# Altium PCB BK Robot.PcbDoc (part 1 of 2)
Units mil, origin at the board's own origin, x right, y up, seen from the top; angles counter-clockwise.
Board outline 3937.01 x 3937.01 mil, 2 copper layers (Top Layer, Bottom Layer); 189 components, 168 nets, 636 pads, 401 vias.
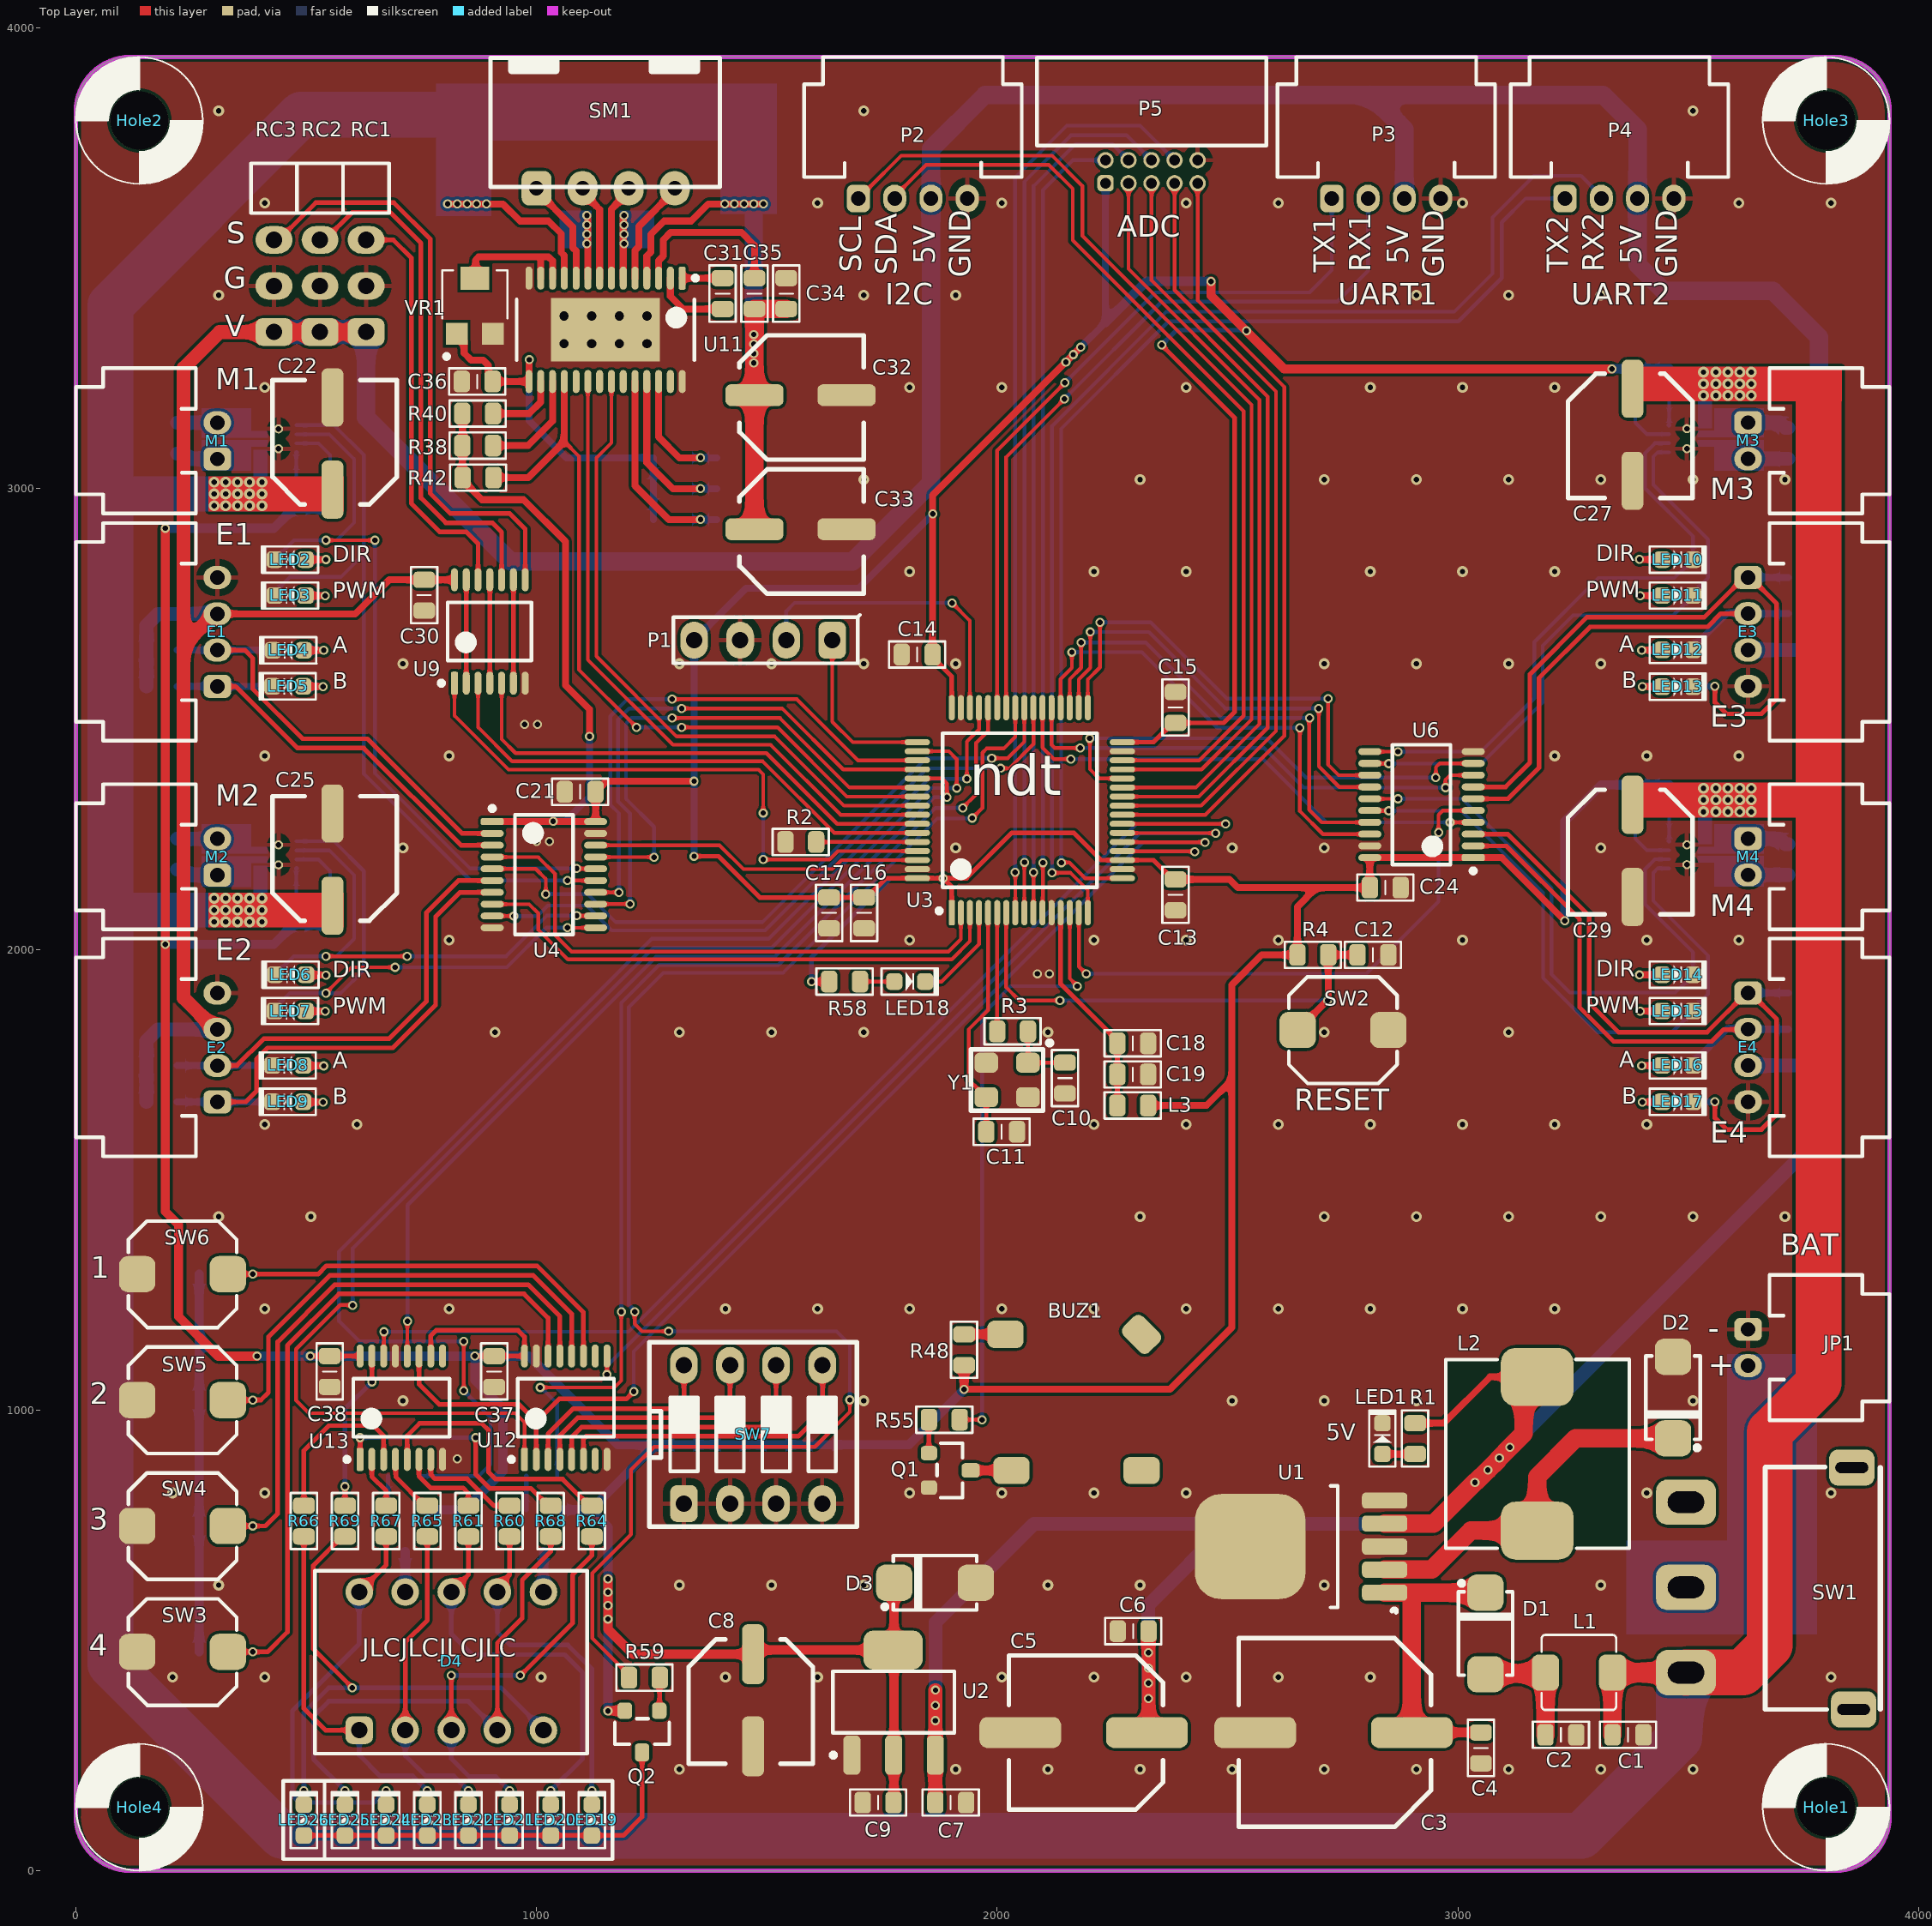
[diagram p0: Top Layer view]
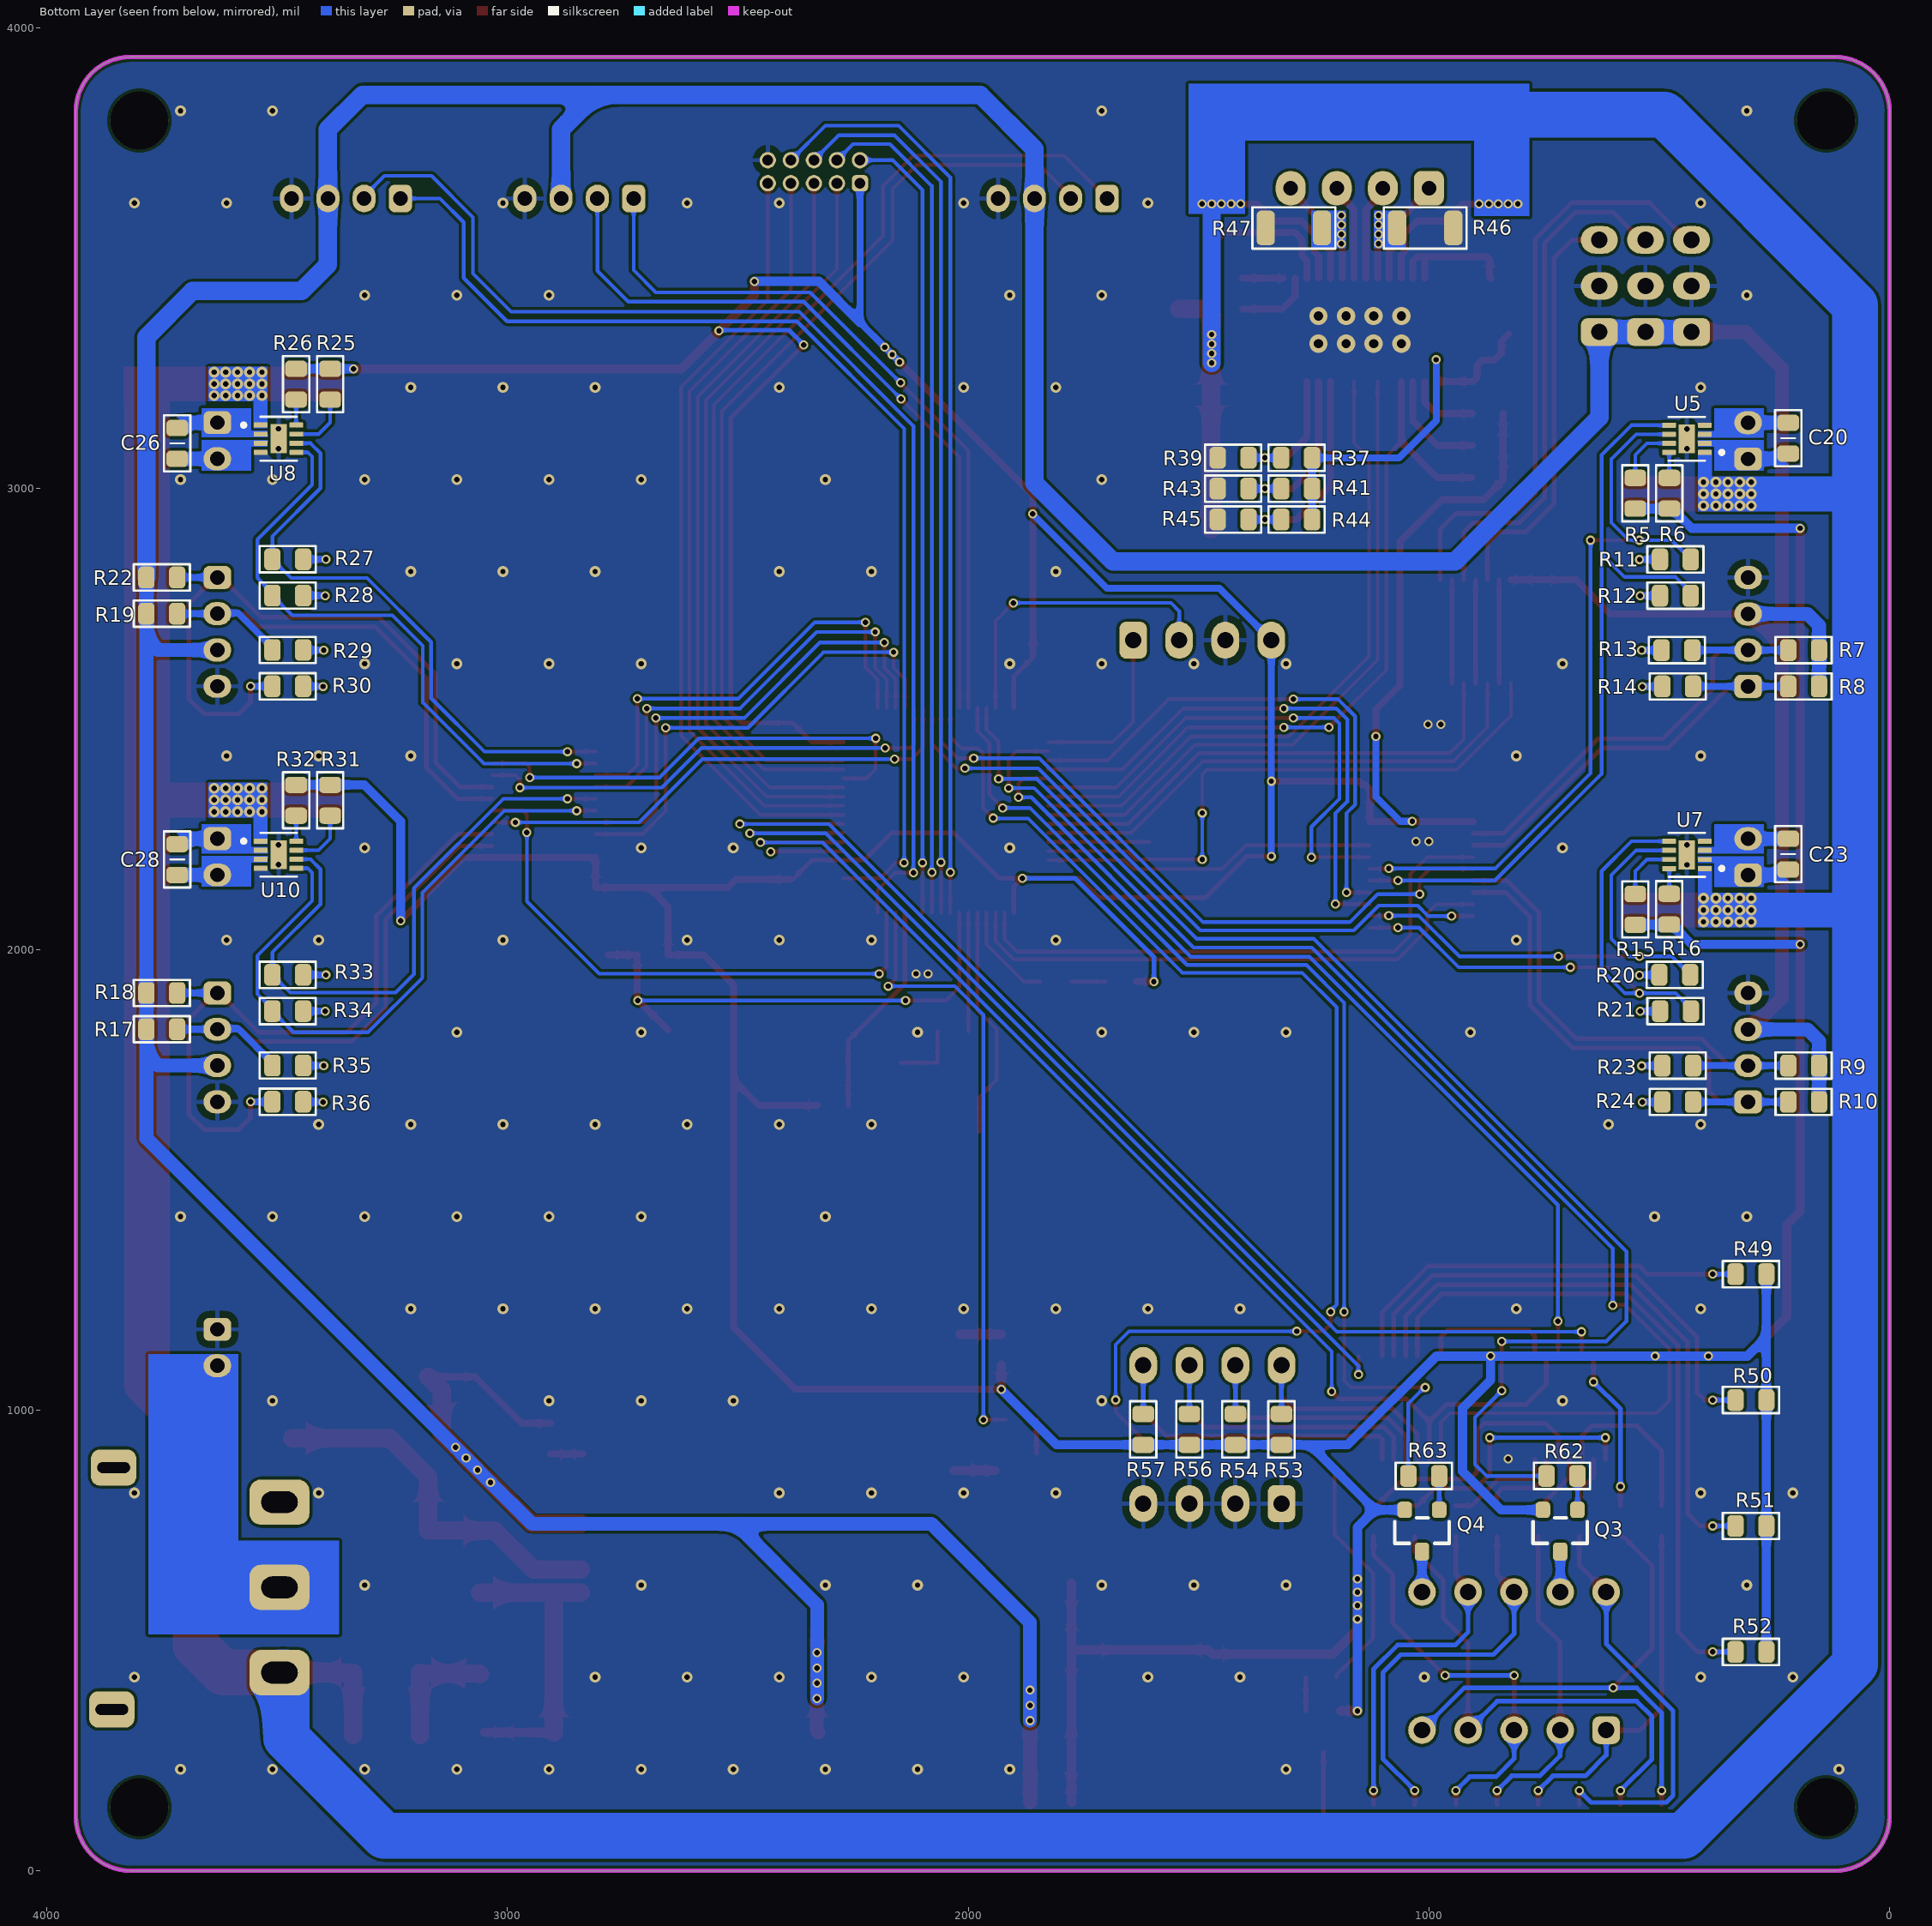
[diagram p1: Bottom Layer view, seen from below]
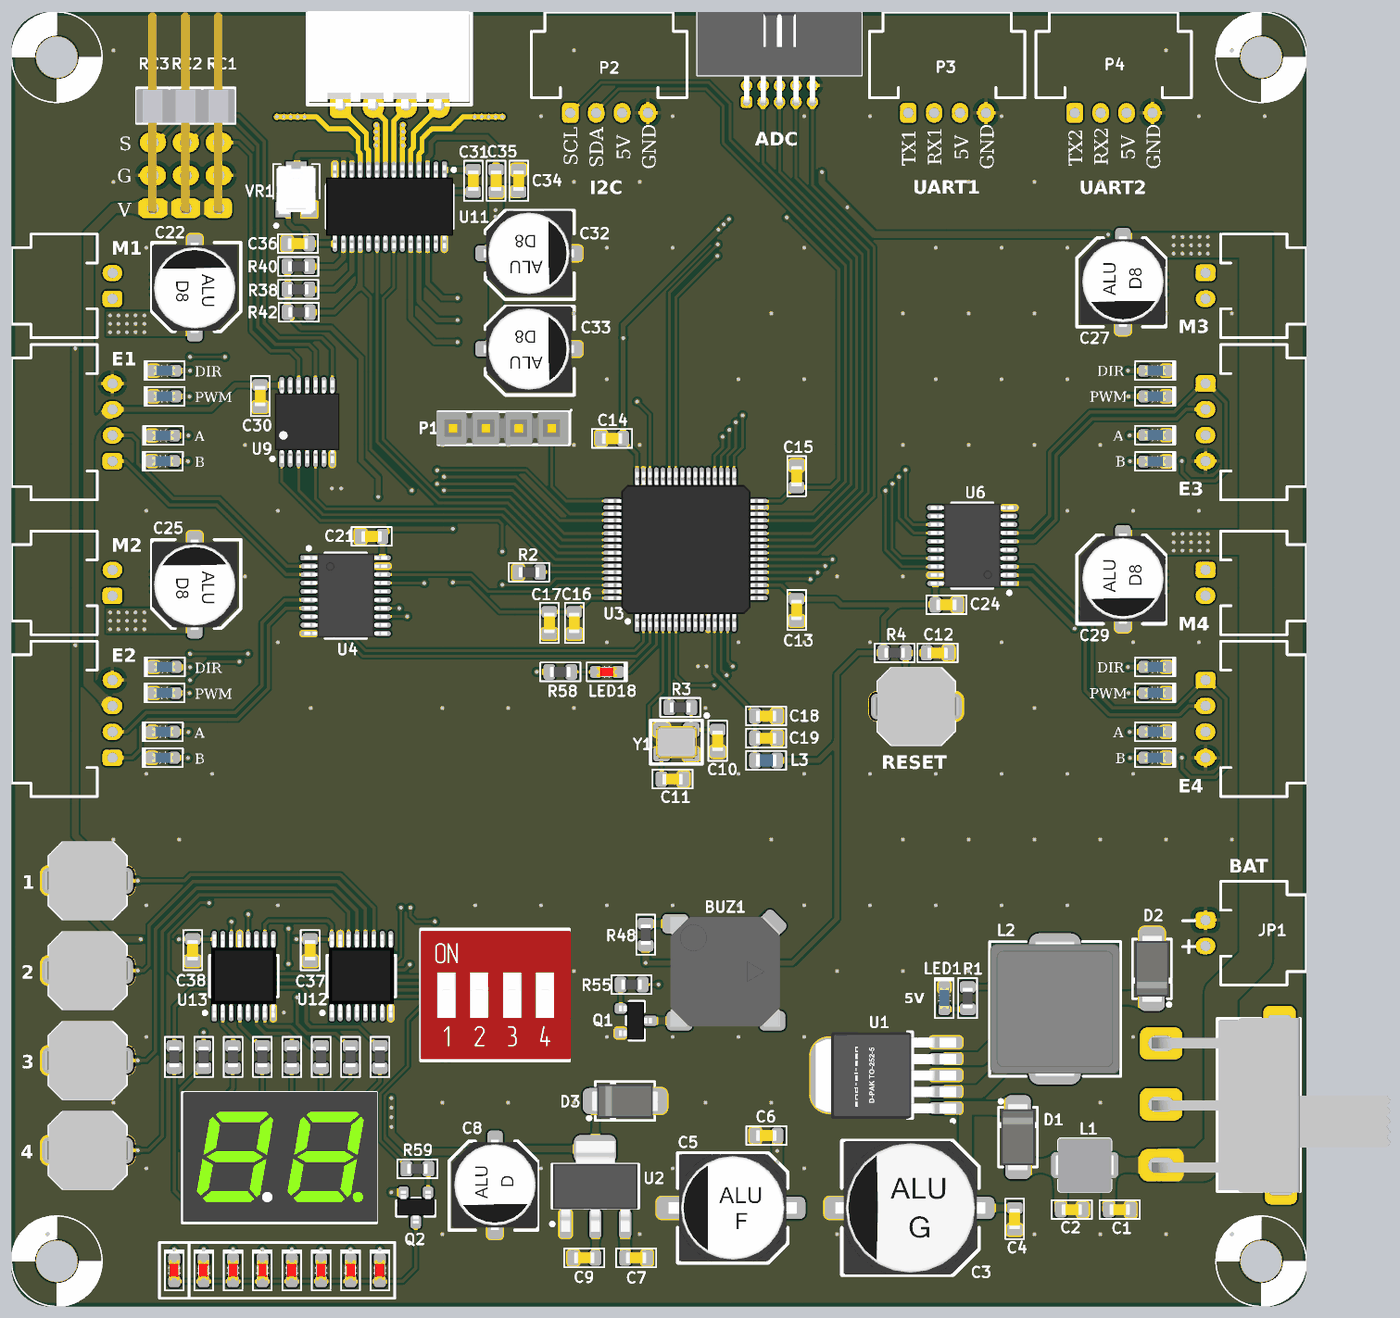
[diagram p3: 3D render of the assembled board from above, using the file's embedded part models]
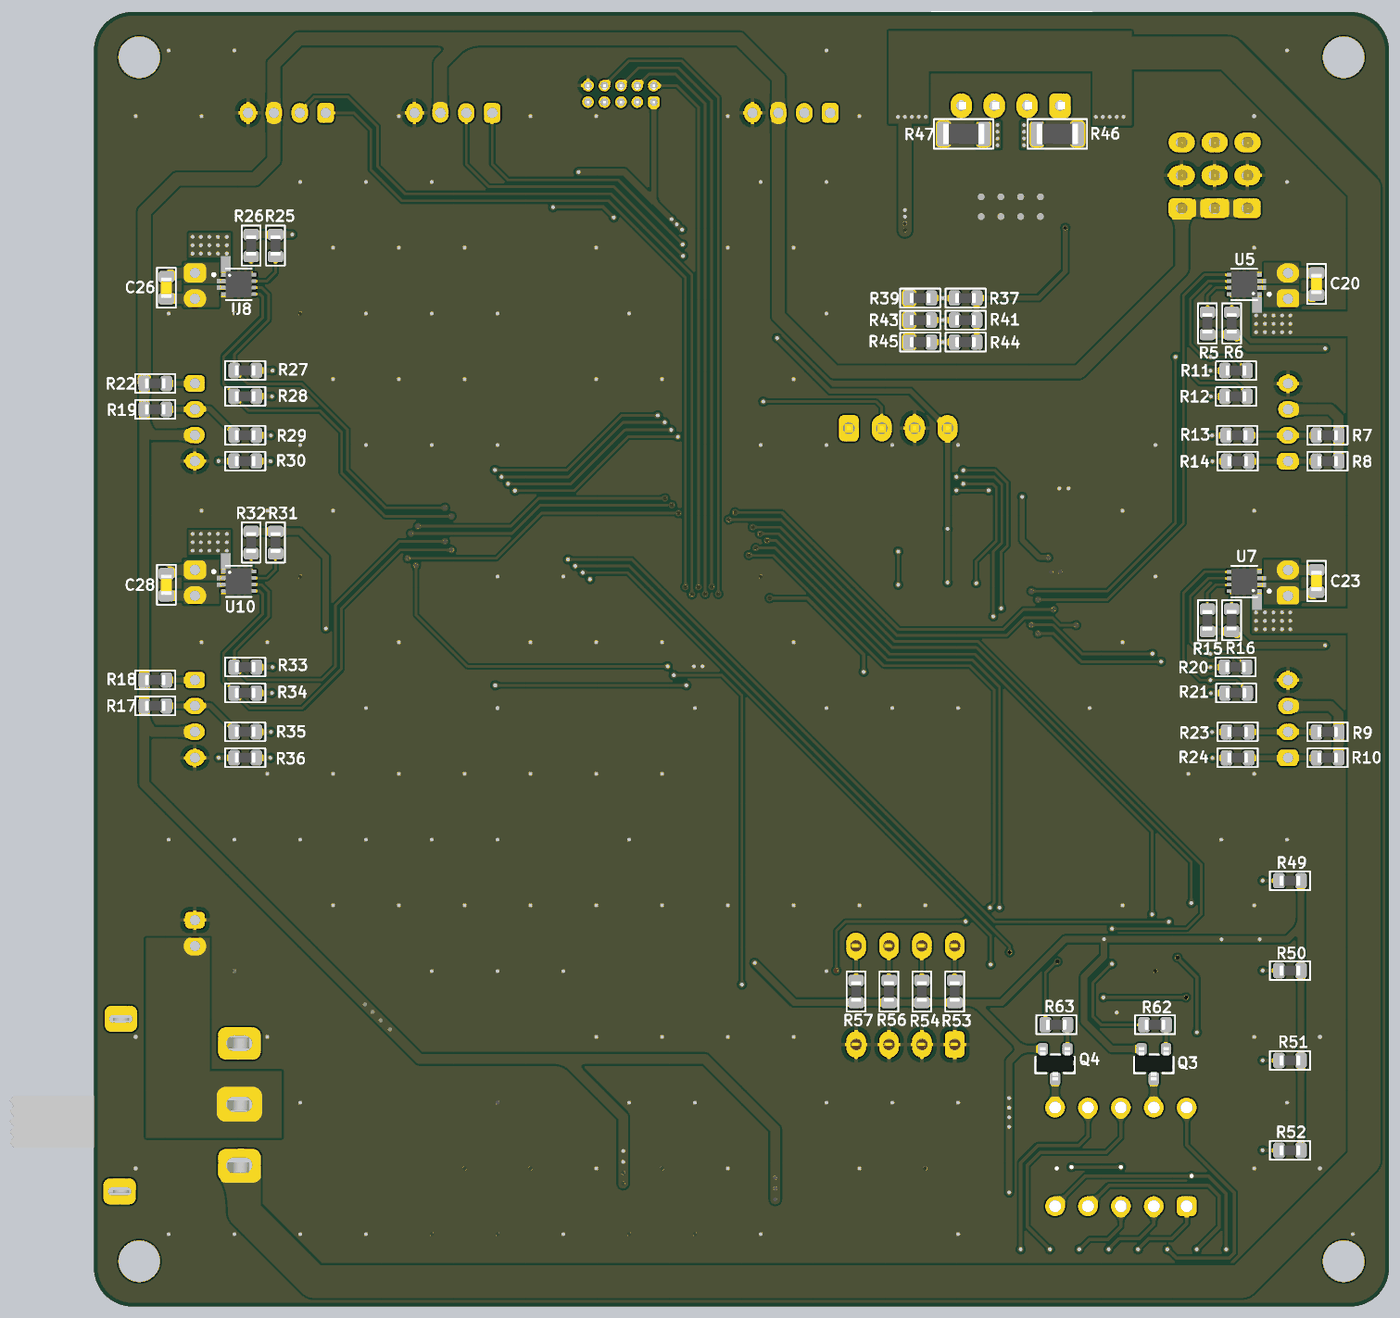
[diagram p4: 3D render of the assembled board from below, using the file's embedded part models]

## Layer stack, top to bottom
Top Solder: solder mask 0.4, Solder Resist, Dk 3.5
Top Layer: signal copper 1.4
Dielectric 1: dielectric 12.6, FR-4, Dk 4.8
Bottom Layer: signal copper 1.4
Bottom Solder: solder mask 0.4, Solder Resist, Dk 3.5

## Board outline
0,118.11 ccw(c118.11,118.11) 118.11,0 3818.9,0 ccw(c3818.9,118.11) 3937.01,118.11 3937.01,3818.9 ccw(c3818.9,3818.9) 3818.9,3937.01 118.11,3937.01 ccw(c118.11,3818.9) 0,3818.9

## Design rules (kind name [scope] priority, off if disabled: settings)
Clearance [All] p1: gap=6 ignorepadtopadclearanceinfootprint=FALSE except(0: Arc-Hole Track-Hole SMDPad-Hole THPad-Hole Via-Hole Fill-Hole Poly-Hole Region-Hole Text-Hole; 7: Track-SMDPad; 10: Arc-Arc Arc-THPad Arc-Fill Arc-Text Track-THPad Track-Fill Track-Text SMDPad-THPad SMDPad-Fill SMDPad-Text THPad-THPad THPad-Fill THPad-Text Via-Fill Via-Text Fill-Fill Fill-Text Poly-Text Region-Text Text-Text)
PolygonConnect [All] p1: thpad.connectstyle=Relief thpad.reliefconductorwidth=10 thpad.reliefentries=4 thpad.polygonreliefangle="90 Angle" thpad.airgapwidth=15 smdpad.connectstyle=Direct smdpad.reliefconductorwidth=10 smdpad.reliefentries=4 smdpad.polygonreliefangle="90 Angle" smdpad.airgapwidth=10 via.connectstyle=Direct via.reliefconductorwidth=10 via.reliefentries=4 via.polygonreliefangle="90 Angle" via.airgapwidth=10
RoutingVias [All] p1: holewidth=28 width=50 viastyle="Through Hole" minholewidth=11.81 minwidth=19.68 maxholewidth=28 maxwidth=50
SolderMaskExpansion [All] p1: expansion=4 istentingtop=FALSE
Width [All] p1: maxlimit=100 minlimit=8 preferedwidth=10
30 further rules are at their usual default settings.

## Classes and differential pairs
component class Power: C1 C2 C3 C4 C5 C6 C7 C8 C9 D1 D2 D3 Hole1 Hole2 Hole3 Hole4 JP1 L1 L2 LED1 R1 SW1 U1 U2
component class Peripheral: P2 P4 P5
component class MotorDriver: C20 C21 C22 C23 C24 C25 C26 C27 C28 C29 C30 C31 C32 C33 C34 C35 C36 E1 E2 E3 E4 LED2 LED3 LED4 LED5 LED6 LED7 LED8 LED9 LED10 LED11 LED12 LED13 LED14 LED15 LED16 LED17 M1 M2 M3 M4 R5 R6 R7 R8 R9 R10 R11 R12 R13 R14 R15 R16 R17 R18 R19 R20 R21 R22 R23 R24 R25 R26 R27 R28 R29 R30 R31 R32 R33 R34 R35 R36 R37 R38 R39 R40 R41 R42 R43 R44 R45 R46 R47 RC1 RC2 RC3 SM1 U4 U5 U6 U7 U8 U9 U10 U11 VR1
component class MCU: C10 C11 C12 C13 C14 C15 C16 C17 C18 C19 L3 R2 R3 R4 SW2 U3 Y1
component class Debug: BUZ1 C37 C38 D4 LED18 LED19 LED20 LED21 LED22 LED23 LED24 LED25 LED26 P2 Q1 Q2 Q3 Q4 R48 R49 R50 R51 R52 R53 R54 R55 R56 R57 R58 R59 R60 R61 R62 R63 R64 R65 R66 R67 R68 R69 SW3 SW4 SW5 SW6 SW7 U12 U13

## Components (designator, comment, footprint, x,y, rotation, side; value= is the part's Value field where it differs from the comment)
BUZ1 "MTL-8530" MLT-8530 2018,1164.28 r0 top
C1 "100nF" "C 0603 (1608)" 3369.13,295 r0 top
C2 "100nF" "C 0603 (1608)" 3223.46,295 r0 top
C3 "330uF/50V" "C SMD ALU (G)" 2730,300 r180 top
C4 "100nF" "C 0603 (1608)" 3050,266.54 r270 top
C5 "330uF/25V" "C SMD ALU (F)" 2187.5,300 r180 top
C6 "100nF" "C 0603 (1608)" 2295,520 r180 top
C7 "100nF" "C 0603 (1608)" 1899.02,148 r0 top
C8 "220uF/10V" "C SMD ALU (D)" 1470,370 r270 top
C9 "100nF" "C 0603 (1608)" 1741.54,148 r180 top
C10 "22pF" "C 0603 (1608)" 2147,1720.54 r270 top
C11 "22pF" "C 0603 (1608)" 2009.63,1604 r0 top
C12 "100nF" "C 0603 (1608)" 2815.54,1988 r0 top
C13 "100nF" "C 0603 (1608)" 2387,2118.37 r270 top
C14 "100nF" "C 0603 (1608)" 1826,2640 r180 top
C15 "100nF" "C 0603 (1608)" 2387,2525 r90 top
C16 "100nF" "C 0603 (1608)" 1711,2079 r270 top
C17 "10uF" "C 0603 (1608)" 1635,2079 r270 top
C18 "100nF" "C 0603 (1608)" 2294,1796 r0 top
C19 "10uF" "C 0603 (1608)" 2294,1728.5 r0 top
C20 "100nF" "C 0603 (1608)" 220,3109.73 r270 bottom
C21 "100nF" "C 0603 (1608)" 1094.74,2342 r180 top
C22 "100uF/25V" "C SMD ALU (D8)" 557,3098 r90 top
C23 "100nF" "C 0603 (1608)" 220,2206.54 r270 bottom
C24 "100nF" "C 0603 (1608)" 2842.24,2134.08 r0 top
C25 "100uF/25V" "C SMD ALU (D8)" 557,2194.81 r90 top
C26 "100nF" "C 0603 (1608)" 3716.98,3098.22 r90 bottom
C27 "100uF/25V" "C SMD ALU (D8)" 3379,3117 r270 top
C28 "100nF" "C 0603 (1608)" 3716.98,2195.02 r90 bottom
C29 "100uF/25V" "C SMD ALU (D8)" 3379,2213.81 r270 top
C30 "100nF" "C 0603 (1608)" 756,2768.74 r270 top
C31 "10nF" "C 0603 (1608)" 1404,3423.54 r90 top
C32 "100uF/25V" "C SMD ALU (D8)" 1573,3203 r0 top
C33 "100uF/25V" "C SMD ALU (D8)" 1573,2912 r0 top
C34 "100nF" "C 0603 (1608)" 1542,3423.54 r270 top
C35 "100nF" "C 0603 (1608)" 1473,3423.54 r90 top
C36 "1uF" "C 0603 (1608)" 871,3232.59 r180 top
C37 "100nF" "C 0603 (1608)" 908,1083.74 r270 top
C38 "100nF" "C 0603 (1608)" 551,1083.74 r270 top
D1 "SS34" "DO-214AC (SMA)" 3060,515 r90 top
D2 "SS34" "DO-214AC (SMA)" 3467,1027 r270 top
D3 "SS34" "DO-214AC (SMA)" 1865,625 r180 top
D4 "LED7_2281BS" "LED7 2281" 615,305 r0 top
E1 "HY2.0-4P" HY2.0-4P-RA 306.98,2570.78 r90 top
E2 "HY2.0-4P" HY2.0-4P-RA 306.98,1668.78 r90 top
E3 "HY2.0-4P" HY2.0-4P-RA 3630,2807.3 r270 top
E4 "HY2.0-4P" HY2.0-4P-RA 3630,1905.3 r270 top
Hole1 "3mm" SCREW/3M/7M 3799.21,137.8 r0 top
Hole2 "3mm" SCREW/3M/7M 137.8,3799.21 r0 top
Hole3 "3mm" SCREW/3M/7M 3799.21,3799.21 r0 top
Hole4 "3mm" SCREW/3M/7M 137.8,137.8 r0 top
JP1 "HY2.0-2P" HY2.0-2P-RA 3630,1175 r270 top value="Connector 2"
L1 "10uH" "Inductor SMD 0420" 3335.67,429.92 r0 top
L2 "33uH/3A" "Inductor SMD 10x10x5" 3172,905 r90 top
L3 "600R" "L 0603 (1608)" 2294,1531 r0 top
LED1 "Led-Red" "Led SMD 0603" 2836,938 r90 top
LED2 "Led-Red" "Led SMD 0603" 465,2846 r180 top
LED3 "Led-Red" "Led SMD 0603" 465,2768 r180 top
LED4 "Led-Red" "Led SMD 0603" 461,2649 r180 top
LED5 "Led-Red" "Led SMD 0603" 460,2571 r180 top
LED6 "Led-Red" "Led SMD 0603" 466,1945 r180 top
LED7 "Led-Red" "Led SMD 0603" 465,1866 r180 top
LED8 "Led-Red" "Led SMD 0603" 460,1748 r180 top
LED9 "Led-Red" "Led SMD 0603" 460,1669 r180 top
LED10 "Led-Red" "Led SMD 0603" 3477,2846 r0 top
LED11 "Led-Red" "Led SMD 0603" 3477,2768 r0 top
LED12 "Led-Red" "Led SMD 0603" 3477,2650 r0 top
LED13 "Led-Red" "Led SMD 0603" 3477,2570 r0 top
LED14 "Led-Red" "Led SMD 0603" 3477,1945 r0 top
LED15 "Led-Red" "Led SMD 0603" 3477,1866 r0 top
LED16 "Led-Red" "Led SMD 0603" 3477,1748 r0 top
LED17 "Led-Red" "Led SMD 0603" 3477,1669 r0 top
LED18 "Led-Red" "Led SMD 0603 RED" 1810,1930 r0 top
LED19 "Led-Red" "Led SMD 0603 RED" 1120,110 r90 top
LED20 "Led-Red" "Led SMD 0603 RED" 1030.71,110 r90 top
LED21 "Led-Red" "Led SMD 0603 RED" 941.43,110 r90 top
LED22 "Led-Red" "Led SMD 0603 RED" 852.14,110 r90 top
LED23 "Led-Red" "Led SMD 0603 RED" 762.86,110 r90 top
LED24 "Led-Red" "Led SMD 0603 RED" 673.57,110 r90 top
LED25 "Led-Red" "Led SMD 0603 RED" 584.29,110 r90 top
LED26 "Led-Red" "Led SMD 0603 RED" 495,110 r90 top
M1 "HY2.0-2P" HY2.0-2P-RA 306.98,3064.45 r90 top value="Connector 2"
M2 "HY2.0-2P" HY2.0-2P-RA 306.98,2161.26 r90 top value="Connector 2"
M3 "HY2.0-2P" HY2.0-2P-RA 3630,3143.49 r270 top value="Connector 2"
M4 "HY2.0-2P" HY2.0-2P-RA 3630,2240.3 r270 top value="Connector 2"
P1 "Header 4" "Header 4" 1642,2671 r180 top
P2 "HY2.0-4P" HY2.0-4P-RA 1698.78,3630 r0 top
P3 "HY2.0-4P" HY2.0-4P-RA 2726.26,3630 r0 top
P4 "HY2.0-4P" HY2.0-4P-RA 3232.52,3630 r0 top
P5 "Header 5X2" DC3-10P-1.27MM-RA 2235,3713 r0 top
Q1 "C1815" SOT-23 1897,869 r0 top
Q2 "A1015" SOT-23 1229,302 r270 top
Q3 "A1015" SOT-23 715,738 r270 bottom
Q4 "A1015" SOT-23 1015,738 r270 bottom
R1 "10k" "R 0603 (1608)" 2907,938 r90 top
R2 "10k" "R 0603 (1608)" 1573.46,2233.1 r0 top
R3 "330R" "R 0603 (1608)" 2033.25,1822 r180 top
R4 "10k" "R 0603 (1608)" 2685,1988 r0 top
R5 "0R" "R 0603 (1608)" 552,2990 r270 bottom
R6 "10k" "R 0603 (1608)" 478,2990 r270 bottom
R7 "4k7" "R 0603 (1608)" 186.54,2649.52 r180 bottom
R8 "4k7" "R 0603 (1608)" 186.54,2570.78 r180 bottom
R9 "4k7" "R 0603 (1608)" 186.54,1747.52 r180 bottom
R10 "4k7" "R 0603 (1608)" 186.54,1668.78 r180 bottom
R11 "2k2" "R 0603 (1608)" 465,2846.38 r180 bottom
R12 "2k2" "R 0603 (1608)" 465,2767.64 r180 bottom
R13 "2k2" "R 0603 (1608)" 461.54,2649.52 r180 bottom
R14 "2k2" "R 0603 (1608)" 460,2570.78 r180 bottom
R15 "0R" "R 0603 (1608)" 552,2086.81 r270 bottom
R16 "10k" "R 0603 (1608)" 478.39,2087.2 r270 bottom
R17 "4k7" "R 0603 (1608)" 3750.45,1826.56 r0 bottom
R18 "4k7" "R 0603 (1608)" 3750.45,1905.3 r0 bottom
R19 "4k7" "R 0603 (1608)" 3750.45,2728.56 r0 bottom
R20 "2k2" "R 0603 (1608)" 466.28,1944.64 r180 bottom
R21 "2k2" "R 0603 (1608)" 464.74,1865.9 r180 bottom
R22 "4k7" "R 0603 (1608)" 3750.45,2807.3 r0 bottom
R23 "2k2" "R 0603 (1608)" 460,1747.52 r180 bottom
R24 "2k2" "R 0603 (1608)" 460,1668.78 r180 bottom
R25 "0R" "R 0603 (1608)" 3384.98,3226.68 r90 bottom
R26 "10k" "R 0603 (1608)" 3458.98,3226.68 r90 bottom
R27 "2k2" "R 0603 (1608)" 3476.98,2846.68 r0 bottom
R28 "2k2" "R 0603 (1608)" 3476.98,2768 r0 bottom
R29 "2k2" "R 0603 (1608)" 3476.98,2649.82 r0 bottom
R30 "2k2" "R 0603 (1608)" 3476.98,2571.08 r0 bottom
R31 "0R" "R 0603 (1608)" 3384.98,2323.49 r90 bottom
R32 "10k" "R 0603 (1608)" 3458.98,2323.49 r90 bottom
R33 "2k2" "R 0603 (1608)" 3476.98,1944.68 r0 bottom
R34 "2k2" "R 0603 (1608)" 3476.98,1865.94 r0 bottom
R35 "2k2" "R 0603 (1608)" 3476.98,1747.82 r0 bottom
R36 "2k2" "R 0603 (1608)" 3477,1669.08 r0 bottom
R37 "0R" "R 0603 (1608)" 1287,3067 r0 bottom
R38 "10k" "R 0603 (1608)" 872,3093.53 r0 top
R39 "0R" "R 0603 (1608)" 1425,3067 r180 bottom
R40 "10k" "R 0603 (1608)" 872,3163.06 r0 top
R41 "0R" "R 0603 (1608)" 1287,3000 r0 bottom
R42 "10k" "R 0603 (1608)" 873,3024 r180 top
R43 "0R" "R 0603 (1608)" 1425,3000 r180 bottom
R44 "0R" "R 0603 (1608)" 1287,2933 r0 bottom
R45 "0R" "R 0603 (1608)" 1425,2933 r180 bottom
R46 "0.1R" "R 1206 (3216)" 1008,3566 r180 bottom
R47 "0.1R" "R 1206 (3216)" 1293,3566 r0 bottom
R48 "10R" "R 0603 (1608)" 1928,1130.81 r270 top
R49 "10k" "R 0603 (1608)" 301,1295 r0 bottom
R50 "10k" "R 0603 (1608)" 301,1021.67 r0 bottom
R51 "10k" "R 0603 (1608)" 301,748.33 r0 bottom
R52 "10k" "R 0603 (1608)" 301,475 r0 bottom
R53 "10k" "R 0603 (1608)" 1320,958 r90 bottom
R54 "10k" "R 0603 (1608)" 1420,958 r90 bottom
R55 "4k7" "R 0603 (1608)" 1885.19,979 r180 top
R56 "10k" "R 0603 (1608)" 1520,958 r90 bottom
R57 "10k" "R 0603 (1608)" 1620,958 r90 bottom
R58 "4k7" "R 0603 (1608)" 1668.46,1930 r180 top
R59 "4k7" "R 0603 (1608)" 1234,419 r180 top
R60 "100R" "R 0603 (1608)" 941.43,759 r270 top
R61 "100R" "R 0603 (1608)" 852.14,759 r270 top
R62 "4k7" "R 0603 (1608)" 711.06,857 r0 bottom
R63 "4k7" "R 0603 (1608)" 1011.06,857 r0 bottom
R64 "100R" "R 0603 (1608)" 1120,759 r270 top
R65 "100R" "R 0603 (1608)" 762.86,759 r270 top
R66 "100R" "R 0603 (1608)" 495,759 r270 top
R67 "100R" "R 0603 (1608)" 673.57,759 r270 top
R68 "100R" "R 0603 (1608)" 1030.71,759 r270 top
R69 "100R" "R 0603 (1608)" 584.29,759 r270 top
RC1 "Header 3" "Header 3 - RA" 630,3340 r90 top
RC2 "Header 3" "Header 3 - RA" 530,3340 r90 top
RC3 "Header 3" "Header 3 - RA" 430,3340 r90 top
SM1 "XH2.54-4P" "CON Header 4 - RA" 1000,3652 r0 top value="Connector 4"
SW1 "SW SPDT" SW/3/SPDT/SS12D11 3495,614.96 r270 top
SW2 "Button" "SW/2/SMD - 6X6X5" 2652.15,1825 r0 top
SW3 "Button" "SW/2/SMD - 6X6X5" 133.15,475 r0 top
SW4 "Button" "SW/2/SMD - 6X6X5" 133.15,748.33 r0 top
SW5 "Button" "SW/2/SMD - 6X6X5" 133.15,1021.67 r0 top
SW6 "Button" "SW/2/SMD - 6X6X5" 133.15,1295 r0 top
SW7 "SW DIP-4" SW/DIP4 1320,797 r0 top
U1 "TD1507-5" TO-252-5 2695,703.58 r180 top
U2 "AMS1117-33" SOT-223 1775,365 r90 top
U3 "STM32F103RCT6" LQFP64_N 2049,2302 r90 top
U4 "74HC245" "TSSOP 20 65P" 1016,2162 r0 top
U5 "DRV8220" "WSON 2X2X0.5MM" 440,3108.19 r0 bottom
U6 "74HC245" "TSSOP 20 65P" 2920.98,2314.08 r180 top
U7 "DRV8220" "WSON 2X2X0.5MM" 440,2205 r0 bottom
U8 "DRV8220" "WSON 2X2X0.5MM" 3496.98,3108.49 r180 bottom
U9 "74HC14" "TSSOP 14 65P" 911,2690 r90 top
U10 "DRV8220" "WSON 2X2X0.5MM" 3496.98,2205.3 r180 bottom
U11 "DRV8825" "TSSOP 28 65P EP" 1149.75,3344.8 r270 top
U12 "74HC165" "TSSOP 16 65P" 1063,1005 r90 top
U13 "74HC595" "TSSOP 16 65P" 706,1005 r90 top
VR1 "10k" TRIM_TC33X-2-103E 866,3402.91 r90 top
Y1 "8MHz" "Crystal SMD 4PIN 3225" 2066.72,1754 r180 top

## Footprints (in the part's own frame and the unit in brackets; to place one, negate y for a bottom-side part, rotate by r counter-clockwise, add the part's x,y. Pads: shape width x height; smd on the part's side, far side on the other; paste and mask are expansions set on the pad)
"C 0603 (1608)" [mm] "Chip Capacitor, 2-Leads, Body 1.6x0.8mm, IPC Medium Density"
  rrect50% 0.9x1.2 smd: 1(-0.85,0) 2(0.85,0)
  silkscreen extent -1.55,-0.72 1.55,0.72, body extent -0.8,-0.43 0.8,0.43, height 0.81
"C SMD ALU (D8)" [mm] "SMD Aluminum Electrolytic Capacitor, size D8 (6.3 x 7.7 mm)"
  rrect50% 3.2x1.2 smd: 1(-2.54,0) 2(2.54,0)
  silkscreen extent -3.37,-3.56 3.49,3.3, body extent -3.5,-3.3 3.5,3.3, height 7.7
"C SMD ALU (D)" [mm] "SMD Aluminum Electrolytic Capacitor, size D (6.3 x 5.4 mm)"
  rrect50% 3.3x1.2 smd: 1(-2.54,0) 2(2.54,0)
  silkscreen extent -3.37,-3.56 3.49,3.3, body extent -3.5,-3.3 3.5,3.3, height 5.4
"C SMD ALU (F)" [mm] "SMD Aluminum Electrolytic Capacitor, size F (8.0 x 10.2 mm)"
  rrect50% 4.5x1.7 smd: 1(-3.492,0) 2(3.492,0)
  silkscreen extent -4.38,-4.25 4.12,4.25, body extent -5.08,-4.15 4.82,4.15, height 10.2
"C SMD ALU (G)" [mm] "SMD Aluminum Electrolytic Capacitor, size G (10.0 x 10.2 mm)"
  rrect50% 4.5x1.7 smd: 1(-4.318,0) 2(4.318,0)
  silkscreen extent -5.37,-5.2 5.23,5.2, body extent -5.87,-5.15 5.73,5.15, height 10.2
"CON Header 4 - RA" [mil]
  rrect50% 65x75 hole 31.5: 1(0,0)
  oval 65x75 hole 31.5: 2(100,0) 3(200,0) 4(300,0)
  silkscreen extent -100,3 398,284, body extent -100,-12 392,288, height 214
"Crystal SMD 4PIN 3225" [mm]
  rrect50% 1.3x1.1 smd: 1(0,0) 2(2.3,0) 3(2.3,1.9) 4(0,1.9)
  silkscreen extent -1.32,-1.22 3.15,2.64, body extent -0.46,-0.29 2.74,2.21, height 0.6
DC3-10P-1.27MM-RA [mm]
  rrect50% 0.9x0.9 hole 0.6: 1(0,-1.27)
  round 0.9 hole 0.6: 2(0,0) 3(1.27,-1.27) 4(1.27,0) 5(2.54,-1.27) 6(2.54,0) 7(3.81,-1.27) 8(3.81,0) 9(5.08,-1.27) 10(5.08,0)
  silkscreen extent -3.78,0.81 8.86,5.65, body extent -3.81,-1.48 8.89,5.69, height 5.04
"DO-214AC (SMA)" [mm] "Molded Diode, 2-Leads, Body 4.3x2.7mm, IPC Medium Density"
  rrect50% 2x2 smd: 1(-2.25,0) 2(2.25,0)
  silkscreen extent -2.3,-1.5 2.89,1.58, body extent -2.6,-1.3 2.6,1.3, height 2.4
"Header 3 - RA" [mil]
  rrect50% 60x80 hole 35.43: 1(0,0)
  oval 60x80 hole 35.43: 2(100,0) 3(200,0)
  silkscreen extent 258,-50 366,50, body extent -13,-49 596,51, height 300
"Header 4" [mil]
  rrect50% 60x80 hole 35.43: 1(0,0)
  oval 60x80 hole 35.43: 2(100,0) 3(200,0) 4(300,0)
  silkscreen extent -60,-55 345,50, body extent -50,-50 350,50, height 350
HY2.0-2P-RA [mm]
  rrect50% 1.27x1.524 hole 0.8: 1(0,0)
  oval 1.27x1.524 hole 0.8: 2(2,0)
  silkscreen extent -3,1.18 5,7.8
HY2.0-4P-RA [mm]
  rrect50% 1.27x1.524 hole 0.8: 1(0,0)
  oval 1.27x1.524 hole 0.8: 2(2,0) 3(4,0) 4(6,0)
  silkscreen extent -3,1.18 9,7.8
"Inductor SMD 10x10x5" [mm]
  rrect50% 3.2x4 smd: 1(-4.238,0) 2(4.238,0)
  Top Layer pour cut-out: 5.207,4.953 -5.207,4.953 -5.207,-5.08 5.207,-5.08
  silkscreen extent -5.21,-5.08 5.21,5.04, body extent -5.2,-5 5.2,5, height 4.2
"Inductor SMD 0420" [mm]
  rrect50% 1.5x2 smd paste+0 mask+0: 1(0,0) 2(-3.7,0)
  silkscreen extent -3.91,-2.06 0.2,2.08, body extent -4.09,-2.06 0.39,2.06, height 2.02
"L 0603 (1608)" [mm]
  rrect50% 0.9x1.2 smd: 1(-0.85,3.302) 2(0.85,3.302)
  silkscreen extent -1.55,2.58 1.55,4.03, body extent -0.8,2.83 0.8,3.78, height 0.78
"LED7 2281" [mil]
  rrect50% 60x60 hole 35.43: 1(0,0)
  round 60 hole 35.43: 2(100,0) 3(200,0) 4(300,0) 5(400,0) 6(400,300) 7(300,300) 8(200,300) 9(100,300) 10(0,300)
  silkscreen extent -96,-51 495,346, body extent -94,-47 498,347, height 240
"Led SMD 0603" [mm] "Led SMD 0603"
  rrect50% 0.9x0.914 smd: 1(-0.85,0) 2(0.85,0)
  silkscreen extent -1.55,-0.72 1.55,0.72, body extent -0.81,-0.4 0.81,0.4, height 0.6
"Led SMD 0603 RED" [mm] "Led SMD 0603"
  rrect50% 0.9x0.914 smd: 1(-0.85,0) 2(0.85,0)
  silkscreen extent -1.55,-0.72 1.55,0.72, body extent -0.8,-0.4 0.8,0.4, height 0.6
LQFP64_N [mil] "Thin QFP, 64-Leads, Body 10x10mm, Pitch 0.5mm, IPC Medium Density"
  rrect50% 55x13 smd: 1(-222.5,147.64)
  oval 55x13 smd: 2(-222.5,127.95) 3(-222.5,108.27) 4(-222.5,88.58) 5(-222.5,68.9) 6(-222.5,49.21) 7(-222.5,29.53) 8(-222.5,9.84) 9(-222.5,-9.84) 10(-222.5,-29.53) 11(-222.5,-49.21) 12(-222.5,-68.9) 13(-222.5,-88.58) 14(-222.5,-108.27) 15(-222.5,-127.95) 16(-222.5,-147.64) 33(222.5,-147.64) 34(222.5,-127.95) 35(222.5,-108.27) 36(222.5,-88.58) 37(222.5,-68.9) 38(222.5,-49.21) 39(222.5,-29.53) 40(222.5,-9.84) 41(222.5,9.84) 42(222.5,29.53) 43(222.5,49.21) 44(222.5,68.9) 45(222.5,88.58) 46(222.5,108.27) 47(222.5,127.95) 48(222.5,147.64)
  oval 13x55 smd: 17(-147.64,-222.5) 18(-127.95,-222.5) 19(-108.27,-222.5) 20(-88.58,-222.5) 21(-68.9,-222.5) 22(-49.21,-222.5) 23(-29.53,-222.5) 24(-9.84,-222.5) 25(9.84,-222.5) 26(29.53,-222.5) 27(49.21,-222.5) 28(68.9,-222.5) 29(88.58,-222.5) 30(108.27,-222.5) 31(127.95,-222.5) 32(147.64,-222.5) 49(147.64,222.5) 50(127.95,222.5) 51(108.27,222.5) 52(88.58,222.5) 53(68.9,222.5) 54(49.21,222.5) 55(29.53,222.5) 56(9.84,222.5) 57(-9.84,222.5) 58(-29.53,222.5) 59(-49.21,222.5) 60(-68.9,222.5) 61(-88.58,222.5) 62(-108.27,222.5) 63(-127.95,222.5) 64(-147.64,222.5)
  silkscreen extent -223,-167 167,180, body extent -236,-237 236,235, height 63
MLT-8530 [mm]
  rrect50% 2x1.5 smd: 1(0,0) 2(0.33,-7.5) 3(7.5,-7.5)
  rrect50% 1.5x2 smd rot 45: 4(7.5,0)
  body extent -0.39,-7.96 8.11,0.54, height 3
"R 0603 (1608)" [mm] "Chip Resistor, 2-Leads, Body 1.6x0.8mm, IPC Medium Density"
  rrect50% 0.9x1.2 smd: 1(-0.85,0) 2(0.85,0)
  silkscreen extent -1.55,-0.72 1.55,0.72, body extent -0.8,-0.4 0.8,0.4, height 0.5
"R 1206 (3216)" [mm] "Chip Resistor, 2-Leads, Body 3.1x1.6mm, IPC Medium Density"
  rrect50% 1x1.9 smd: 1(-1.55,0) 2(1.55,0)
  silkscreen extent -2.29,-1.14 2.29,1.14, body extent -1.6,-0.8 1.6,0.8, height 0.6
SCREW/3M/7M [mm]
  round 3.2 hole 3.2: 1(0,0)
  silkscreen extent -3.54,-3.53 3.53,3.54
SOT-23 [mm] "SOT23, 3-Leads, Body 3.0x2.5mm (max), Pitch 0.95mm, IPC Medium Density"
  rrect50% 0.9x0.8 smd: 1(-1.15,0.95) 2(-1.15,-0.95)
  rrect50% 1x0.8 smd: 3(1.15,0)
  silkscreen extent -0.71,-1.5 0.7,1.5, body extent -1.28,-1.46 1.27,1.46, height 0.95
SOT-223 [mm] "SOT223, 4-Leads, Body 6.7x7.3mm (max), Pitch 2.30mm, IPC Medium Density"
  rrect50% 2.15x0.94 smd: 1(-2.899,2.3) 2(-2.899,0) 3(-2.899,-2.3)
  rrect50% 2.15x3.25 smd: 4(2.899,0.025)
  silkscreen extent -3.02,-3.35 1.72,3.45, body extent -3.51,-3.25 3.49,3.25, height 1.64
"SW/2/SMD - 6X6X5" [mm]
  rrect50% 2x2 smd paste+0 mask+0.2: 1(0,0) 2(5,0)
  silkscreen extent -0.48,-2.95 5.49,2.92, body extent -0.81,-3 5.79,3, height 4.3
SW/3/SPDT/SS12D11 [mm]
  rrect50% 2x2.5 hole 0.6 slot 1.8 at 90 deg: 0(-6.605,9.144) 0(6.73,9.246)
  rrect50% 2.5x3.3 hole 1.2 slot 2 at 90 deg: 1(-4.7,0) 2(0,0) 3(4.7,0)
  silkscreen extent -6.63,4.34 6.73,10.72, body extent -6.67,-0.73 6.83,17.72, height 6.3
SW/DIP4 [mil]
  rrect50% 60x80 hole 35.43: 1(0,0)
  oval 60x80 hole 35.43: 2(100,0) 3(200,0) 4(300,0) 5(300,300) 6(200,300) 7(100,300) 8(0,300)
  silkscreen extent -75,-50 375,350, body extent -77,-45 381,345, height 268
TO-252-5 [mm]
  rrect50% 2.5x0.889 smd: 1(-3.705,2.54) 2(-3.705,1.27) 3(-3.705,0) 4(-3.705,-1.27) 5(-3.705,-2.54)
  rrect50% 6.1x5.8 smd: 6(3.705,0)
  silkscreen extent -4.36,-3.35 -0.73,3.63, body extent -4.51,-3.32 6.36,3.38, height 2.4
TRIM_TC33X-2-103E [mm]
  rect 1.2x1.2 smd: 1(-1.698,1) 3(-1.698,-1)
  rect 1.27x1.6 smd: 2(1.374,0)
  silkscreen extent -3.07,-1.8 1.8,1.8, body extent -2.08,-1.48 1.72,1.52, height 1.1
"TSSOP 14 65P" [mil]
  rrect50% 50x15 smd: 1(-112.2,89.16)
  oval 50x15 smd: 2(-112.2,63.57) 3(-112.2,37.98) 4(-112.2,12.39) 5(-112.2,-13.2) 6(-112.2,-38.8) 7(-112.2,-64.39) 8(112.2,-64.39) 9(112.2,-38.8) 10(112.2,-13.2) 11(112.2,12.39) 12(112.2,37.98) 13(112.2,63.57) 14(112.2,89.16)
  silkscreen extent -117,-78 63,123, body extent -125,-86 127,110, height 47
"TSSOP 16 65P" [mil]
  rrect50% 50x15 smd: 1(-112.2,89.16)
  oval 50x15 smd: 2(-112.2,63.57) 3(-112.2,37.98) 4(-112.2,12.39) 5(-112.2,-13.2) 6(-112.2,-38.8) 7(-112.2,-64.39) 8(-112.2,-89.98) 9(112.2,-89.98) 10(112.2,-64.39) 11(112.2,-38.8) 12(112.2,-13.2) 13(112.2,12.39) 14(112.2,37.98) 15(112.2,63.57) 16(112.2,89.16)
  silkscreen extent -117,-105 63,123, body extent -125,-99 127,98, height 47
"TSSOP 20 65P" [mm] "TSOP, 20-Leads, Body 6.6x4.5mm (max), Pitch 0.65mm, IPC Medium Density"
  rrect50% 1.27x0.381 smd: 1(-2.85,2.925)
  oval 1.27x0.381 smd: 2(-2.85,2.275) 3(-2.85,1.625) 4(-2.85,0.975) 5(-2.85,0.325) 6(-2.85,-0.325) 7(-2.85,-0.975) 8(-2.85,-1.625) 9(-2.85,-2.275) 10(-2.85,-2.925) 11(2.85,-2.925) 12(2.85,-2.275) 13(2.85,-1.625) 14(2.85,-0.975) 15(2.85,-0.325) 16(2.85,0.325) 17(2.85,0.975) 18(2.85,1.625) 19(2.85,2.275) 20(2.85,2.925)
  silkscreen extent -2.97,-3.3 1.6,3.77, body extent -3.2,-3.25 3.21,3.25, height 1
"TSSOP 28 65P EP" [mm] "TSOP, 28-Leads, Body 9.8x4.5mm (max), Pitch 0.65mm, IPC Medium Density"
  rrect50% 1.27x0.381 smd: 1(-2.85,4.225)
  oval 1.27x0.381 smd: 2(-2.85,3.575) 3(-2.85,2.925) 4(-2.85,2.275) 5(-2.85,1.625) 6(-2.85,0.975) 7(-2.85,0.325) 8(-2.85,-0.325) 9(-2.85,-0.975) 10(-2.85,-1.625) 11(-2.85,-2.275) 12(-2.85,-2.925) 13(-2.85,-3.575) 14(-2.85,-4.225) 15(2.85,-4.225) 16(2.85,-3.575) 17(2.85,-2.925) 18(2.85,-2.275) 19(2.85,-1.625) 20(2.85,-0.975) 21(2.85,-0.325) 22(2.85,0.325) 23(2.85,0.975) 24(2.85,1.625) 25(2.85,2.275) 26(2.85,2.925) 27(2.85,3.575) 28(2.85,4.225)
  rect 3.5x6 smd: 29(0,0)
  silkscreen extent -2.97,-4.9 1.68,5.08, body extent -3.2,-4.9 3.2,4.9, height 1.1
"WSON 2X2X0.5MM" [mm]
  rrect25% 0.76x0.28 smd: 1(-0.985,0.75) 2(-0.985,0.25) 3(-0.985,-0.25) 4(-0.985,-0.75) 5(0.985,-0.75) 6(0.985,-0.25) 7(0.985,0.25) 8(0.985,0.75)
  rect 0.9x1.6 smd paste-2: 9(0,0)
  round 0.5 hole 0.3 mask+0: 10(0,0.55) 11(0,-0.55)
  silkscreen extent -2.02,-1.21 1,1.21, body extent -1,-1 1,1, height 0.8

## Part data
BUZ1: library part Buzzer
C1 C2 C4 C6 C7 C9 C10 C11 C12 C13 C14 C15 C16 C17 C18 C19 C20 C21 C23 C24 C26 C28 C30 C31 C34 C35 C36 C37 C38: library part "Capacitor NP", "Capacitor non-pol"
C3 C5 C8 C22 C25 C27 C29 C32 C33: library part Capacitor, "Capacitor pol"
D1 D2 D3: library part Diode, "Default Diode", Code_JEDEC=DO-214-AB, LatestRevisionDate=17-Jul-2002, LatestRevisionNote="Re-released for DXP Platform.", PackageReference=SMC, PackageVersion=Sep-1996, Published=8-Jun-2000, Publisher="Altium Limited"
E1 E2 E3 E4 P2 P3 P4: library part "Header 4", "Header, 4-Pin"
Hole1 Hole2 Hole3 Hole4: library part Screw
JP1 M1 M2 M3 M4: library part Con2, "Connector 2"
L1 L2 L3: library part Inductor, "Inductor"
LED1 LED2 LED3 LED4 LED5 LED6 LED7 LED8 LED9 LED10 LED11 LED12 LED13 LED14 LED15 LED16 LED17 LED18 LED19 LED20 LED21 LED22 LED23 LED24 LED25 LED26: library part Led, "Typical LED"
P1: "Header, 4-Pin"
P5: "Header, 5-Pin, Dual row", LatestRevisionDate=17-Jul-2002, LatestRevisionNote="Re-released for DXP Platform.", Publisher="Altium Limited"
Q1: library part "Transistor NPN", "NPN Bipolar Transistor"
Q2 Q3 Q4: library part "Transistor PNP", "PNP Bipolar Transistor", LatestRevisionDate=29-May-2009, LatestRevisionNote="IPC-7351 Footprint Added.", PackageDescription="3-Pin SOT-23 Package 0.95 mm Pitch, 2.4 mm Lead Span", PackageReference=SOT-23B, PackageVersion=Aug-1999, Published=8-Jun-2000, Publisher="Altium Limited"
R1 R2 R3 R4 R5 R6 R7 R8 R9 R10 R11 R12 R13 R14 R15 R16 R17 R18 R19 R20 R21 R22 R23 R24 R25 R26 R27 R28 R29 R30 R31 R32 R33 R34 R35 R36 R37 R38 R39 R40 R41 R42 R43 R44 R45 R46 R47 R48 R49 R50 R51 R52 R53 R54 R55 R56 R57 R58 R59 R60 R61 R62 R63 R64 R65 R66 R67 R68 R69: library part Resistor, "Resistor", LatestRevisionDate=17-Jul-2002, LatestRevisionNote="Re-released for DXP Platform.", PackageReference=AXIAL-0.3, Published=8-Jun-2000, Publisher="Altium Limited"
RC1 RC2 RC3: "Header, 3-Pin"
SM1: library part Con4, "Connector 4"
SW2 SW3 SW4 SW5 SW6: library part "SW SPST", "Tact switch 2 pin"
U1: library part TD1507, "4A 300KHz 32V Buck DC to DC Converter"
U2: library part AMS1117, "1A LDO Voltage Regulator, ADJ or fixed 1.5/1.8/2.5/2.85/3.3/5V"
U3: "ARM Cortex-M3 32-bit MCU, 256 KB Flash, 48 KB Internal RAM, 51 I/Os, 64-pin LQFP, -40 to 85 degC, Tray", I/Os (High Current)=51, Operating Frequency(F) (Processor speed) (MHz)=72, Supplier Part Number 1=497-9033-ND, Supply Voltage(Vcc) min (V)=2, A/D Converter="3x12-bit (16 Channel)", ComponentLink1Description="Manufacturer URL", ComponentLink1URL=http://www.st.com/web/en/home.html, ComponentLink2Description=Datasheet, ComponentLink2URL=http://www.st.com/st-web-ui/static/active/en/resource/technical/document/datasheet/CD00191185.pdf, ComponentLink3Description="Package Specification", ComponentLink3URL=http://www.st.com/st-web-ui/static/active/en/resource/technical/document/datasheet/DM00037051.pdf, Core="ARM Cortex-M3", D/A Converter="2x12-bit (2 Channel)", DatasheetVersion="Rev. 8", FLASH Size (Prog) (kB)=256, Internal RAM Size (kB)=48, Mounting Technology="Surface Mount", PackageDescription="64-Pin Low Profile Quad Flat Package, 10 x 10 mm Body, 0.5 mm Pitch", PackageReference=LQFP64, PackageVersion="Rev. 4, 06/2013", Packing=Tray, PartNumber=STM32F103RCT6, Supplier 1=Digi-Key, Supplier 2=Newark, Supplier 3=Newark, Supplier 4=Mouser, Supplier Part Number 2=01P4099, Supplier Part Number 3=57P1227, Supplier Part Number 4=511-STM32F103RCT6
U4 U6: "Octal bus tranceiver, 3-state"
U5 U7 U8 U10: "18-V H-Bridge Motor Driver", Package="WSON-8 Texas Instruments", Availability="In Stock", Check_prices=https://www.snapeda.com/parts/DRV8838DSGR/Texas+Instruments/view-part/?ref=eda, MF="Texas Instruments", MP=DRV8838DSGR, Price=None, Purchase-URL=https://pricing.snapeda.com/search/part/DRV8838DSGR/?ref=eda, SnapEDA_Link=https://www.snapeda.com/parts/DRV8838DSGR/Texas+Instruments/view-part/?ref=snap
U9: "Hex Schmitt Trigger"
U12 U13: "8-bit serial-in, serial or parallel-out  shift register with output latches;  3-state"
VR1: library part "Resistor Variable", "Resistor Variable"
Y1: library part "Crystal 4pin"

## Via types
v1: diameter 23.62, hole 11.81, Top Layer to Bottom Layer, tented both sides, 208 vias
v2: diameter 19.68, hole 11.81, Top Layer to Bottom Layer, tented both sides, 167 vias
v3: diameter 19.68, hole 11.81, Top Layer to Bottom Layer, tented bottom, 18 vias
v4: diameter 40, hole 20, Top Layer to Bottom Layer, tented both sides, 8 vias

## Nets (pads, with @x,y where several pads share a name; then routed paths per layer and width w, separated by ;. In a path a pad name is that pad's centre, name@x,y a point inside that pad or via, vN(x,y) a via of type N, cw(c..) or ccw(c..) an arc to the next point about the centre after c; other vN are vias at no path point)
3V3: C8.1 C9.1 C13.1 C14.1 C15.1 C16.1 C17.1 C21.1 C24.1 C37.1 C38.1 D3.2 L3.2 P1.4 P5.1 Q2.2 Q3.2 Q4.2 R4.1 R5.2 R6.2 R15.2 R16.2 R25.2 R26.2 R31.2 R32.2 R38.1 R40.1 R42.2 R48.2 R49.1 R50.1 R51.1 R52.1 R53.1 R54.1 R56.1 R57.1 R58.2 U2.2 U2.4 U3.1 U3.19 U3.32 U3.48 U3.64 U4.1 U4.20 U6.1 U6.20 U12.16 U13.10 U13.16 | length 20185.4
  Top Layer w10: v2(509,1117) 509.1,1117.1 550.9,1117.1 C38.1@551,1117.2 U13.16@616.84,1117.2 ; U13.10@770.39,1117.2 770.39,1161.39 782,1173 960,1173 973.84,1159.16 U12.16@973.84,1117.2 C37.1@908,1117.2 ; v2(866.1,1117.1) 866.2,1117.2 C37.1@908,1117.2 ; C37.1@908.1,1117.31 C37.1@908,1117.2 ; v2@1344.63,2202 1395,2202 1484.54,2112.46 C17.1@1635,2112.46 C16.1@1711,2112.46 1716.91,2112.46 1758.8,2154.36 U3.64@1826.5,2154.36 v2(1882.64,2154.36) ; C14.1@1859.46,2640 1859.46,2634.09 1901.36,2592.2 U3.48@1901.36,2524.5 ; U3.1@1901.36,2079.5 1901.36,2135.64 v2(1882.64,2154.36) ; U3.32@2271.5,2449.64 2339.2,2449.64 2381.09,2491.54 C15.1@2387,2491.54 2491.54,2491.54 2515,2515 2515,3154 v2(2357,3312) ; C13.1@2387,2151.83 2381.09,2151.83 2339.2,2193.73 U3.19@2271.5,2193.73 2225.27,2193.73 2166,2253 2032,2253 1933.36,2154.36 v2(1882.64,2154.36)
  Top Layer w15: R40.1@838.54,3163.06 839.04,3162.56 839.04,3024.5 R42.2@839.54,3024 839.54,3018.09 881.63,2976 972,2976 1063,2885 1063,2573 1115,2521 v2(1115,2462) ; U4.1@903.8,2277.16 U4.20@1128.2,2277.16 C21.1@1128.2,2342 1128.2,2347.17 1138.32,2357.28 1143.49,2357.28 1151.2,2365 v2(1342,2365) ; v2(1597,1930) R58.2@1635,1930 ; C14.1@1859.46,2640 1859.46,2985.46 v2(2149,3275) v2(2165,3291) v2(2181,3307) ; v2(1928,1045) 2375,1045 2509,1179 2509,1716 ; L3.2@2327.46,1661 2454,1661 2509,1716 ; C13.1@2387,2151.83 2504.17,2151.83 2521.92,2134.08 2693.08,2134.08 ; v2(3232,2062) 3095.08,2198.92 U6.1@3033.19,2198.92 U6.20@2808.78,2198.92 C24.1@2808.78,2134.08 2693.08,2134.08 ; 2509,1716 2509,1923 2574,1988 R4.1@2651.54,1988 2651.54,2092.54 2693.08,2134.08
  Top Layer w20: v2(194,2914) v2(194,2010.81) 194,1431 223,1402 223,1203 309,1117 v2(393,1117) ; v2@1155,348 1155.72,347.28 Q2.2@1191.6,347.28 ; v2(1155,633.71) v2(1155,604.56) v2(1155,575.42) v2(1155,546.28) 1155,524 1209,470 C8.1@1470,470 1479.14,479.14 U2.4@1774,479.14 ; C9.1@1775,148 1775.71,148.71 1775.71,624.29 D3.2@1776.42,625 ; v2(1928,1045) R48.2@1928,1097.35 ; v2(2464,3450) 2464,3419 2623,3260 v2(3334,3260)
  Bottom Layer w10: v2(1597,1930) 1597,1983 1768.36,2154.36 v2(1882.64,2154.36) ; v2(2357,3312) 2389,3344 2539,3344 2540,3343 v2(2541,3343)
  Bottom Layer w15: v2(1036,2278) 1062,2278 1115,2331 v2(1115,2462) ; v2(1342,2202) v2(1342,2365) P1.4@1342,2671 1455,2784 1699,2784 v2(1860,2945) ; v2(2149,3275) v2(2165,3291) v2(2181,3307) 2235,3361 P5.1@2235,3663
  Bottom Layer w20: v2(194,2010.81) 429.56,2010.81 472.09,2053.34 R16.2@478,2053.34 ; v2(194,2914) 429.56,2914 472.09,2956.54 R6.2@478,2956.54 R5.2@552,2956.54 ; R52.1@267.54,475 R51.1@267.54,748.33 R50.1@267.54,1021.67 267.54,1158.33 ; R49.1@267.54,1295 267.54,1158.33 ; R16.2@478.39,2053.73 478.58,2053.54 551.81,2053.54 R15.2@552,2053.34 ; Q3.2@752.4,783.28 843.28,783.28 927,867 927,1004 866.1,1064.9 v2(866.1,1117.1) ; Q4.2@1052.4,783.28 1117.28,783.28 ; v2(1155,347) v2(1155,546.28) v2(1155,575.42) v2(1155,604.56) v2(1155,633.71) 1155,745.55 1117.28,783.28 ; v2@1929,1045 1808.54,924.54 R57.1@1620,924.54 R56.1@1520,924.54 R54.1@1420,924.54 R53.1@1320,924.54 1258.54,924.54 ; 2235,3361 2324,3450 v2(2464,3450) ; v2(3232,2062) 3232,2278 3310.96,2356.96 R31.2@3384.98,2356.96 R32.2@3458.98,2356.96 ; v2(3334,3260) 3334.15,3260.15 R25.2@3384.98,3260.15 R26.2@3458.98,3260.15 ; 267.54,1158.33 308.87,1117 v2(393,1117) v2(509,1117) 509.05,1117.05 v2(866.1,1117.1) v2(866.1,1117.1) ; v2(866.1,1117.1) 983.9,1117.1 1176.46,924.54 1258.54,924.54 ; 1117.28,783.28 1258.54,924.54
5V: C5.1 C6.1 C7.1 C30.1 E1.3 E2.3 E3.3 E4.3 L2.2 P2.3 P3.3 P4.3 R1.2 R7.2 R8.2 R9.2 R10.2 R17.2 R18.2 R19.2 R22.2 RC1.1 RC2.1 RC3.1 U1.4 U2.3 U9.14 | length 14651.7
  Top Layer w15: E1.3@306.98,2728.26 606.26,2728.26 680.2,2802.2 C30.1@756,2802.2 U9.14@821.84,2802.2 ; R1.2@2907,971.46 2969.46,971.46 3069.85,1071.85 L2.2@3172,1071.85
  Top Layer w30: E2.3@306.98,1826.26 301.98,1826.26 234,1894.24 234,2660.28 ; E1.3@306.98,2728.26 301.98,2728.26 234,2660.28 ; RC1.1@630,3340 RC2.1@530,3340 RC3.1@430,3340 312,3340 234,3262 234,2660.28 ; C7.1@1865.55,148 U2.3@1865.55,250.86 1865.55,391.55 v2(1866,392) ; C5.1@2325,300 2328.46,303.46 C6.1@2328.46,520
  Top Layer w40: U1.4@2840.89,753.58 2947.58,753.58 3038.5,844.5 3039.5,844.5 v2(3065,870) 3086.5,891.5 3086.5,892.5 v2(3090,896) v2(3113,919) 3142.86,948.86 3142.86,1042.71 L2.2@3172,1071.85
  Bottom Layer w30: R10.2@153.07,1668.78 R9.2@153.07,1747.52 153.07,1801.07 178.26,1826.26 E2.3@306.98,1826.26 ; R8.2@153.07,2570.78 R7.2@153.07,2649.52 153.07,2703.07 178.26,2728.26 E1.3@306.98,2728.26 ; v2(1865.78,325.78) v2(1865.78,358.78) 1865.78,538.78 2080,753 2504,753 ; v2(2328,374) v2(2328,407) v2(2328,440) v2(2328,473) 2328,577 2504,753 ; E4.3@3630,1747.82 3758.72,1747.82 3783.91,1773.01 ; E3.3@3630,2649.82 3758.72,2649.82 3783.91,2675.01 ; R22.2@3783.91,2786 R19.2@3783.91,2728.56 3783.91,2675.01 ; 2504,753 2947,753 v2(3037,843) v2(3090,896) v2(3113,919) 3783.91,1589.91 3783.91,1773.01 ; 3783.91,1773.01 R17.2@3783.91,1826.56 R18.2@3783.91,1905.3 3783.91,2675.01
  Bottom Layer w40: RC1.1@630,3340 630,3155 943,2842 1686,2842 1856.26,3012.26 P2.3@1856.26,3630 1856.26,3737.26 1974,3855 2808.74,3855 ; P3.3@2883.74,3630 2883.74,3780 2808.74,3855 ; R22.2@3783.91,2807.3 3783.91,3329 3683.91,3429 3447,3429 3390,3486 P4.3@3390,3630 3390,3780 3315,3855 2808.74,3855
  Bottom Layer w50: RC3.1@430,3340 RC2.1@530,3340 RC1.1@630,3340
ADC1_IN8: P5.5 U3.26 | length 1663.8
  Top Layer w8: U3.26@2271.5,2331.53 2437.53,2331.53 2587,2481 2587,3200 2335,3452 P5.5@2335,3663
ADC1_IN9: P5.3 U3.27 | length 1646.2
  Top Layer w8: U3.27@2271.5,2351.21 2431.21,2351.21 2569,2489 2569,3193 2285,3477 P5.3@2285,3663
ADC1_IN10: P5.8 U3.8 | length 2020
  Top Layer w8: v2(2039,2167) 2039.08,2166.92 2039.08,2079.57 U3.8@2039.16,2079.5
  Bottom Layer w8: v2(2039,2167) 2039,3676 2151,3788 2310,3788 P5.8@2385,3713
ADC1_IN11: P5.6 U3.9 | length 1926.8
  Top Layer w8: U3.9@2058.84,2079.5 2058.92,2079.57 2058.92,2188.92 v2(2059,2189)
  Bottom Layer w8: v2(2059,2189) 2059,3666 2160,3767 2281,3767 P5.6@2335,3713
ADC1_IN12: P5.4 U3.10 | length 1835.9
  Top Layer w8: U3.10@2078.53,2079.5 2078.76,2079.73 2078.76,2166.76 v2(2079,2167)
  Bottom Layer w8: v2(2079,2167) 2079,3657 2170,3748 2250,3748 P5.4@2285,3713
ADC1_IN13: P5.2 U3.11 | length 1731.8
  Top Layer w8: U3.11@2098.21,2079.5 2099,2080.28 v2(2099,2188)
  Bottom Layer w8: v2(2099,2188) 2099,3648 2164,3713 P5.2@2235,3713
ADC1_IN14: P5.9 U3.24 | length 1700.1
  Top Layer w8: U3.24@2271.5,2292.16 2452.16,2292.16 2623,2463 2623,3221 2435,3409 P5.9@2435,3663
ADC1_IN15: P5.7 U3.25 | length 1680.8
  Top Layer w8: U3.25@2271.5,2311.84 2442.84,2311.84 2605,2474 2605,3211 2385,3431 P5.7@2385,3663
BUTTON_1: R52.2 SW3.2 U12.14 | length 1535.1
  Top Layer w10: SW3.2@330,475 v2(384,475) 416,475 459,518 459,1140 571,1252 973,1252 1025.02,1199.98 U12.14@1025.02,1117.2
  Bottom Layer w10: R52.2@334.46,475 v2(384,475)
BUTTON_2: R51.2 SW4.2 U12.13 | length 1320.2
  Top Layer w10: SW4.2@330,748.33 v2(384,748.33) 411.33,748.33 438,775 438,1148 562,1272 982,1272 1050.61,1203.39 U12.13@1050.61,1117.2
  Bottom Layer w10: R51.2@334.46,748.33 v2(384,748.33)
BUTTON_3: R50.2 SW5.2 U12.12 | length 1104.7
  Top Layer w10: SW5.2@330,1021.67 v2(384,1021.67) 401.67,1021.67 418,1038 418,1159 551,1292 993,1292 1076.2,1208.8 U12.12@1076.2,1117.2
  Bottom Layer w10: R50.2@334.46,1021.67 v2(384,1021.67)
BUTTON_4: R49.2 SW6.2 U12.11 | length 965.5
  Top Layer w10: SW6.2@330,1295 v2(384,1295) 525.72,1295 543.72,1313 1001,1313 1101.8,1212.2 U12.11@1101.8,1117.2
  Bottom Layer w10: R49.2@334.46,1295 v2(384,1295)
BUZZER: R55.1 U3.14 | length 1326.5
  Top Layer w8: R55.1@1918.65,979 v2(1967,979) ; U3.14@2157.27,2079.5 2157.27,1936.73 v2(2174,1920)
  Bottom Layer w8: v2(1967,979) 1967,1858 2029,1920 v2(2174,1920)
DEBUG_LED: LED18.2 U3.4 | length 218.8
  Top Layer w8: LED18.2@1843.46,1930 1879,1930 1960.42,2011.42 U3.4@1960.42,2079.5
DRV1_EN: R12.2 U4.15 U5.5 | length 1692.5
  Top Layer w8: v2(1067,2149.36) 1067.08,2149.28 1128.13,2149.28 U4.15@1128.2,2149.2
  Bottom Layer w8: R12.2@431.28,2775 464.47,2808.19 575,2808.19 625,2858.19 ; U5.5@478.78,3137.72 560.47,3137.72 625,3073.19 625,2858.19 ; v2(1067,2149.36) 856.64,2149.36 631,2375 625,2381 625,2858.19
DRV1_PH: R11.2 U4.16 U5.6 | length 1664.8
  Top Layer w8: v2(542.74,2888) v2(649,2888) ; v2(1087,2175.36) 1087.28,2175.08 1127.92,2175.08 U4.16@1128.2,2174.8
  Bottom Layer w8: R11.2@432.81,2851.11 446.16,2864.45 449.43,2864.45 473.17,2888.19 566,2888.19 604,2926.19 604,3064.19 550.16,3118.04 U5.6@478.78,3118.04 ; v2(649,2888) 649,2382.46 856.09,2175.36 v2(1087,2175.36)
DRV2_EN: R21.2 U4.11 U7.5 | length 1260.5
  Top Layer w8: v2(542.74,1905) 598.74,1961 v2(693,1961) ; v2(1067.08,2046.92) 1067.16,2046.84 U4.11@1128.2,2046.84 U4.11@1128.28,2046.76
  Bottom Layer w8: R21.2@431.28,1871.8 464.47,1905 v2(542.74,1905) 575,1905 625,1955 625,2170 560.47,2234.53 U7.5@478.78,2234.53 ; v2(693,1961) 935.46,1961 1021.46,2047 v2@1067,2047
DRV2_PH: R20.2 U4.12 U7.6 | length 1110
  Top Layer w8: v2(542.74,1985) v2(719,1985) ; v2(1087.08,2072.92) 1087.36,2072.64 1128,2072.64 U4.12@1128.28,2072.35
  Bottom Layer w8: R20.2@432.81,1947.91 446.16,1961.26 449.43,1961.26 473.17,1985 v2(542.74,1985) 566,1985 604,2023 604,2161 550.16,2214.84 U7.6@478.78,2214.84 ; v2(719,1985) 934,1985 1022,2073 v2@1087,2073
DRV3_EN: R28.2 U6.12 U8.5 | length 1329.5
  Top Layer w8: U6.12@2808.74,2403.68 2809.02,2403.4 2849.66,2403.4 v2(2849.94,2403.12)
  Bottom Layer w8: v2(2849.94,2403.12) 3051.12,2403.12 3184,2536 3184,2659 3250,2725 3467.45,2725 3493.82,2751.38 3497.1,2751.38 3510.45,2764.72 R28.2@3510.45,2768 3510.45,2773.91 3543,2806.46 3543,2889.46 3424,3008.46 3424,3069.54 3433.42,3078.96 U8.5@3458.2,3078.96
DRV3_PH: R27.2 U6.11 U8.6 | length 1282.9
  Top Layer w8: U6.11@2808.74,2429.28 U6.11@2808.78,2429.24 2869.86,2429.2 v2(2869.94,2429.12)
  Bottom Layer w8: v2(2869.94,2429.12) 3050.12,2429.12 3166,2545 3166,2667 3305,2806 3469.77,2806 3493.82,2830.05 3497.1,2830.05 3510.45,2843.4 R27.2@3510.45,2846.68 3510.45,2896.55 3406,3001 3406,3077 3427.65,3098.65 U8.6@3458.2,3098.65
DRV4_EN: R34.2 U6.16 U10.5 | length 1432.8
  Top Layer w8: U6.16@2808.74,2301.32 2809.02,2301.04 2849.66,2301.04 v2(2849.94,2300.76)
  Bottom Layer w8: v2(2849.94,2300.76) 3007.24,2300.76 3185,2123 3185,1938 3303,1820 3464.51,1820 3493.82,1849.31 3497.1,1849.31 3510.45,1862.66 R34.2@3510.45,1865.94 ; U10.5@3458.2,2175.77 3433.42,2175.77 3424,2166.35 3424,2105.26 3543,1986.26 3543,1903.27 3510.45,1870.71 R34.2@3510.45,1864.81
DRV4_PH: R33.2 U6.15 U10.6 | length 1338.3
  Top Layer w8: U6.15@2808.74,2326.91 2808.82,2326.83 v2(2869.94,2326.76) v2(2869.94,2326.76)
  Bottom Layer w8: v2(2869.94,2326.76) 3009.24,2326.76 3203,2133 3203,1946 3243,1906 3471.77,1906 3493.82,1928.05 3497.1,1928.05 3510.45,1941.4 R33.2@3510.45,1944.68 ; U10.6@3458.2,2195.46 3427.65,2195.46 3406,2173.81 3406,2097.81 3510.45,1993.36 R33.2@3510.45,1943.48
ENC1_A: E1.2 R7.1 R13.2 U4.2 | length 1009
  Top Layer w10: E1.2@306.98,2649.52 366.48,2649.52 384,2632 384,2565 492,2457 633,2457 838.43,2251.57 U4.2@903.8,2251.57
  Bottom Layer w15: R7.1@220,2649.52 E1.2@306.98,2649.52 R13.2@428.07,2649.52
ENC1_B: E1.1 R8.1 R14.2 U4.3 | length 946.2
  Top Layer w10: E1.1@306.98,2570.78 347.27,2570.78 481.05,2437 624.72,2437 835.74,2225.98 U4.3@903.8,2225.98
  Bottom Layer w15: R8.1@220,2570.78 E1.1@306.98,2570.78 R14.2@426.54,2570.78
ENC2_A: E2.2 R9.1 R23.2 U4.6 | length 1083.9
  Top Layer w10: E2.2@307.14,1747.68 349.44,1747.68 407.76,1806 679.72,1806 761,1887.28 761,2080 830.2,2149.2 U4.6@903.8,2149.2
  Bottom Layer w15: R9.1@220,1747.52 E2.2@306.98,1747.52 R23.2@426.54,1747.52 R23.2@428.07,1747.52
ENC2_B: E2.1 R10.1 R24.2 U4.7 | length 1145.2
  Top Layer w10: E2.1@306.98,1668.78 368.78,1668.78 392,1692 392,1761.93 416.07,1786 688,1786 781,1879 781,2071 833.61,2123.61 U4.7@903.8,2123.61
  Bottom Layer w15: R10.1@220,1668.78 E2.1@306.98,1668.78 R24.2@426.54,1668.78
ENC3_A: E3.2 R19.1 R29.2 U6.6 | length 1121.1
  Top Layer w10: U6.6@3033.19,2326.87 3108.87,2326.87 3175.98,2393.98 3175.98,2588.79 3287.19,2700 3542,2700 3570.56,2728.56 E3.2@3630,2728.56
  Bottom Layer w15: R29.2@3510.45,2649.82 3510.45,2655.72 3584.72,2730 3628.56,2730 E3.2@3630,2728.56 R19.1@3716.98,2728.56
ENC3_B: E3.1 R22.1 R30.2 U6.7 | length 1517.2
  Top Layer w10: U6.7@3033.19,2352.46 3103.37,2352.46 3155.98,2405.08 3155.98,2597.08 3279.9,2721 3534.64,2721 3620.94,2807.3 E3.1@3630,2807.3 3635,2807.3 3692,2750.3 3692,2544 3659,2511 3583,2511 3558,2536 v2(3558,2571)
  Bottom Layer w15: R30.2@3510.45,2571.08 3510.48,2571.04 v2(3558,2571) v2(3558,2571) ; E3.1@3630,2807.3 R22.1@3716.98,2807.3
ENC4_A: E4.2 R17.1 R35.2 U6.2 | length 1133.9
  Top Layer w10: U6.2@3033.19,2224.51 3105.2,2224.51 3264,2065.72 3264,1874 3338,1800 3551,1800 3576.86,1825.86 3629.3,1825.86 E4.2@3630,1826.56
  Bottom Layer w15: R35.2@3510.45,1753.72 3584.72,1828 3628.56,1828 E4.2@3630,1826.56 R17.1@3716.98,1826.56
ENC4_B: E4.1 R18.1 R36.2 U6.3 | length 1535.5
  Top Layer w10: U6.3@3033.19,2250.1 3107.9,2250.1 3285,2073 3285,1884 3349,1820 3540.86,1820 3626.16,1905.3 E4.1@3630,1905.3 ; v2(3558,1669) 3558,1634 3583,1609 3659,1609 3692,1642 3692,1848.3 E4.1@3635,1905.3
  Bottom Layer w15: R36.2@3510.45,1669.08 3510.48,1669.04 v2(3558,1669) v2(3558,1669) ; E4.1@3630,1905.3 R18.1@3716.98,1905.3
ENCODER1_A: U3.62 U4.18 | length 728
  Top Layer w8: U4.18@1128.2,2225.98 1226.99,2225.99 1397.01,2225.99 1449,2174 1642,2174 1661.73,2193.73 U3.62@1826.5,2193.73
ENCODER1_B: U3.54 U4.17 | length 1144.3
  Top Layer w8: U4.17@1128.2,2200.39 1128.4,2200.19 1254.81,2200.19 v2(1255,2200) ; v2(1294,2502) 1528.46,2502 1679.24,2351.21 U3.54@1826.5,2351.21
  Bottom Layer w8: 1195.5,2325.5 1194,2327 ; v2(1255,2200) 1255,2266 1194,2327 ; v2(1294,2502) 1206,2502 1194,2490 1194,2327